# Altium PCB Layout Simetrica.PcbDoc
Units mm, origin at the board's own origin, x right, y up, seen from the top; angles counter-clockwise.
Board outline 84.71 x 36.58 mm, 2 copper layers (Top Layer, Bottom Layer); 22 components, 8 nets, 44 pads, 0 vias.
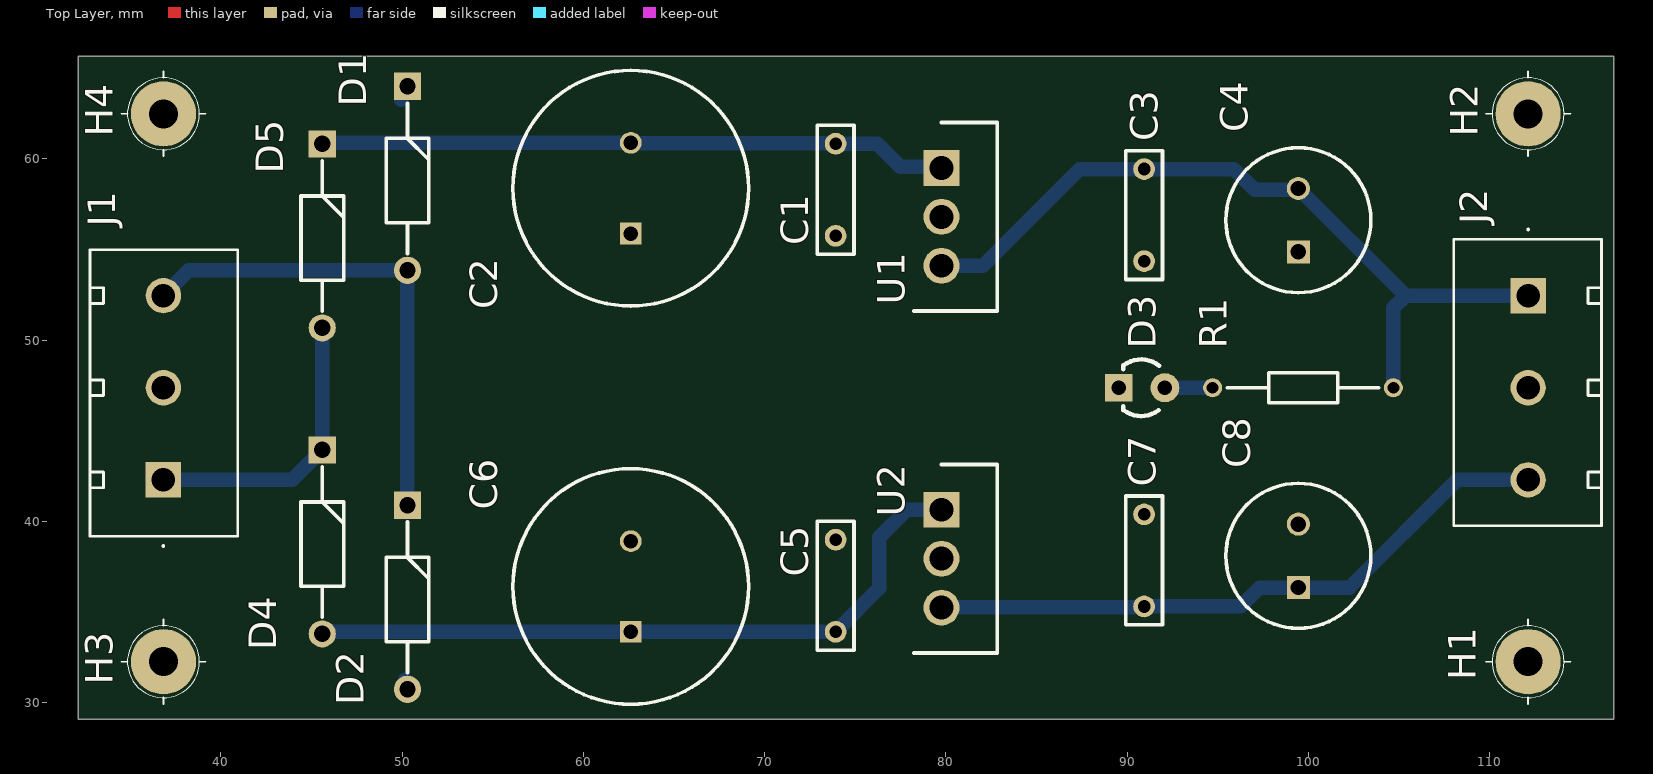
[diagram p0: Top Layer view]
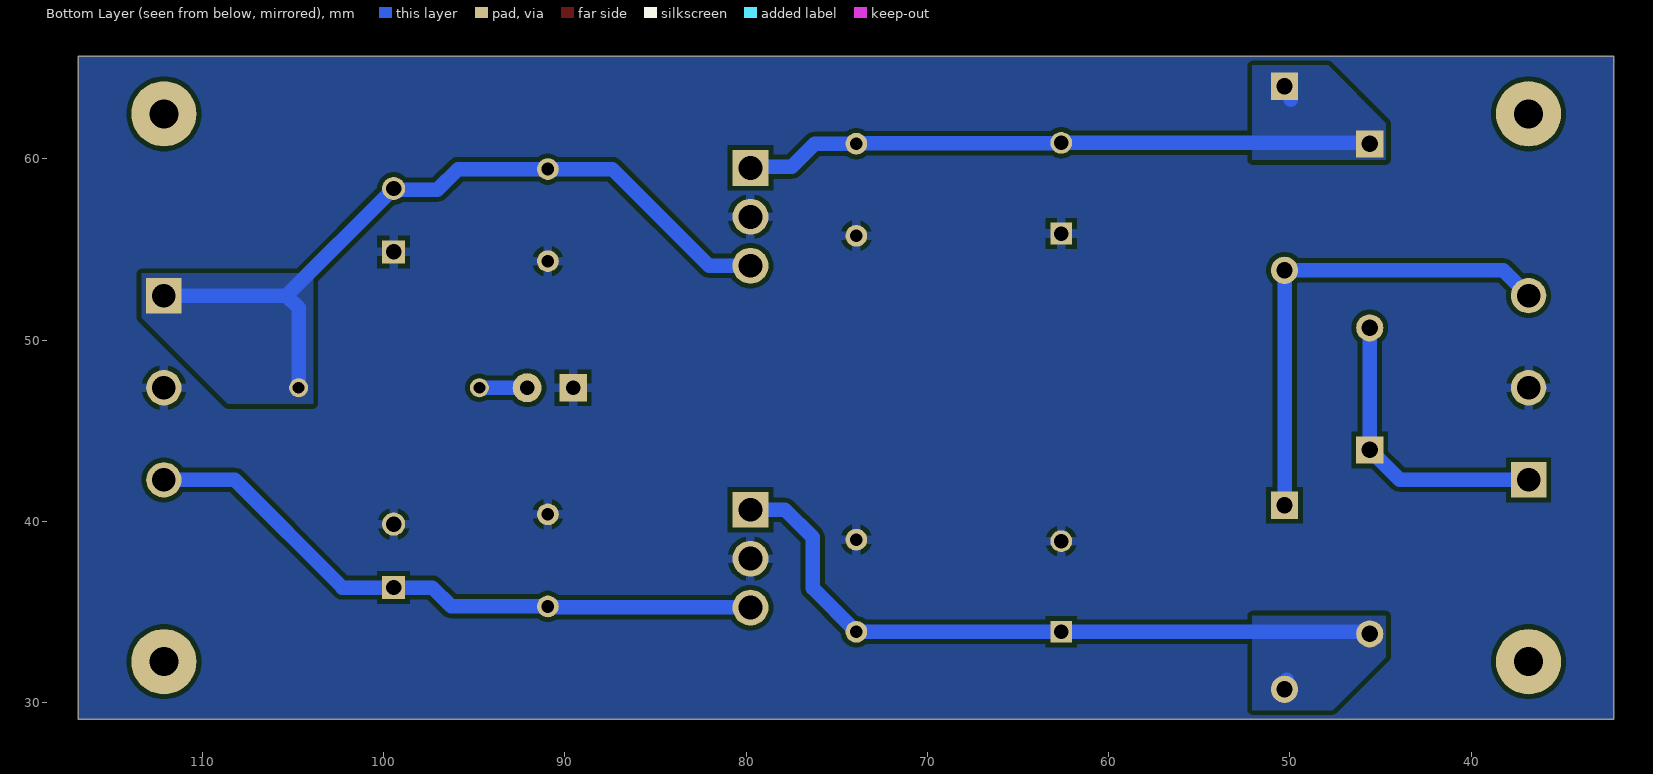
[diagram p1: Bottom Layer view, seen from below]
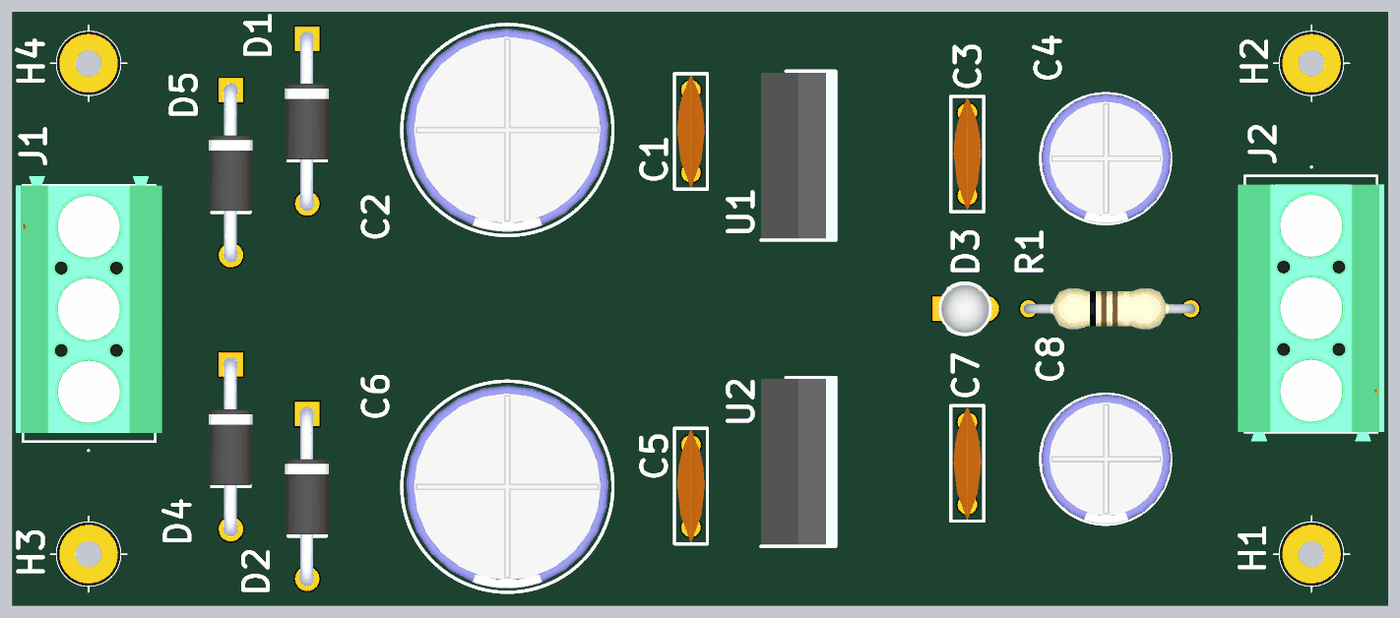
[diagram p2: 3D render of the assembled board from above, using the file's embedded part models]

## Layer stack, top to bottom
Top Solder: solder mask 0.0102, Solder Resist, Dk 3.5
Top Layer: signal copper 0.0356
Dielectric 1: dielectric 0.32, FR-4, Dk 4.8
Bottom Layer: signal copper 0.0356
Bottom Solder: solder mask 0.0102, Solder Resist, Dk 3.5

## Board outline
32.131,29.083 116.84,29.083 116.84,65.659 32.131,65.659

## Design rules (kind name [scope] priority, off if disabled: settings)
Clearance [All] p1: gap=0.254 ignorepadtopadclearanceinfootprint=FALSE except(0: Arc-Hole Track-Hole SMDPad-Hole THPad-Hole Via-Hole Fill-Hole Poly-Hole Region-Hole Text-Hole)
PolygonConnect PolygonConnect_1 [InNet('GND')] p1: thpad.connectstyle=Relief thpad.reliefconductorwidth=0.5 thpad.reliefentries=4 thpad.polygonreliefangle="90 Angle" thpad.airgapwidth=0.254 smdpad.connectstyle=Relief smdpad.reliefconductorwidth=0.254 smdpad.reliefentries=4 smdpad.polygonreliefangle="90 Angle" smdpad.airgapwidth=0.254 via.connectstyle=Relief via.reliefconductorwidth=0.254 via.reliefentries=4 via.polygonreliefangle="90 Angle" via.airgapwidth=0.254
PolygonConnect [All] p2: connectstyle=Direct reliefconductorwidth=0.254 reliefentries=4 polygonreliefangle="90 Angle" airgapwidth=0.254
RoutingVias [All] p1: holewidth=0.711 width=1.27 viastyle="Through Hole" minholewidth=0.711 minwidth=1.27 maxholewidth=0.711 maxwidth=1.27
SolderMaskExpansion [All] p1: expansion=0.102 istentingtop=FALSE
Width [All] p1: maxlimit=0.8 minlimit=0.254 preferedwidth=0.6 minimp=50.000000 maximp=50.000000 favimp=50.000000
30 further rules are at their usual default settings.

## Components (designator, comment, footprint, x,y, rotation, side; value= is the part's Value field where it differs from the comment)
C1 "100nF" RAD-0.2 73.914,58.293 r90 top value=1
C2 "1000x35" "CAP ELETROLITICO 1000" 62.611,58.38 r90 top
C3 "100nF" RAD-0.2 90.932,56.896 r90 top value=1
C4 "220x25" "CAP ELETROLITICO 220" 99.441,56.614 r90 top
C5 "100nF" RAD-0.2 73.914,36.449 r90 top value=1
C6 "1000x35" "CAP ELETROLITICO 1000" 62.611,36.409 r90 top
C7 "100nF" RAD-0.2 90.932,37.846 r90 top value=1
C8 "220x25" "CAP ELETROLITICO 220" 99.441,38.1 r90 top
D1 "Valor" DIOAD1405W58L465D235 50.292,58.801 r270 top
D2 "Valor" DIOAD1405W58L465D235 50.292,35.687 r270 top
D3 "LED" LED_3MM_RED 92.075,47.371 r180 top
D4 "Valor" DIOAD1405W58L465D235 45.593,38.742 r270 top
D5 "Valor" DIOAD1405W58L465D235 45.593,55.623 r270 top
H1 "M3" "Parafuso M3" 112.116,32.258 r0 top
H2 "M3" "Parafuso M3" 112.116,62.484 r0 top
H3 "M3" "Parafuso M3" 36.83,32.258 r0 top
H4 "M3" "Parafuso M3" 36.83,62.484 r0 top
J1 "Conector 2v Phoenix" "TERMINAL BLOCK 5MM 3V" 36.805,47.371 r270 top
J2 "Conector 2v Phoenix" "TERMINAL BLOCK 5MM 3V" 112.141,47.371 r90 top
R1 "2k2" "RES 1/4 PTH" 99.695,47.371 r0 top
U1 "L7812CV" TO220 79.756,56.802 r270 top
U2 "L7912CV" TO220 79.756,37.94 r270 top

## Footprints (in the part's own frame and the unit in brackets; to place one, negate y for a bottom-side part, rotate by r counter-clockwise, add the part's x,y. Pads: shape width x height; smd on the part's side, far side on the other; paste and mask are expansions set on the pad)
"CAP ELETROLITICO 220" [mm]
  round 1.275 hole 0.85: 1(1.75,0)
  rect 1.275x1.275 / inner round 1.275 / far side rect 1.275x1.275 hole 0.85: 2(-1.75,0)
  silkscreen extent -4,-4 4,4, body extent -4,-4.03 4.01,3.96, height 11.51
"CAP ELETROLITICO 1000" [mm]
  round 1.2 hole 0.8: 1(2.5,0)
  rect 1.2x1.2 / inner round 1.2 / far side rect 1.2x1.2 hole 0.8: 2(-2.5,0)
  silkscreen extent -6.5,-6.5 6.5,6.5, body extent -6.26,-6.25 6.25,6.25, height 20.01
DIOAD1405W58L465D235 [mm]
  round 1.5 hole 0.9: A(4.95,0)
  rect 1.5x1.5 hole 0.9: K(-5.2,0)
  silkscreen extent -4.28,-1.17 4.03,1.17, body extent -5.57,-1.38 5.37,1.32, height 2.69
LED_3MM_RED [mm] "Led 3 mm"
  round 1.6 hole 0.8: 1(0,0)
  rect 1.5x1.5 hole 0.8: 2(2.54,0)
  silkscreen extent 0.31,-1.56 2.29,1.56, body extent -0.38,-1.65 2.92,1.65, height 5.31
"Parafuso M3" [mm]
  round 3.6 hole 1.6 unplated: 18(0,0)
  silkscreen extent -2.33,-2.33 2.34,2.34
RAD-0.2 [mm]
  round 1.2 hole 0.7: 1(-2.54,0) 2(2.54,0)
  silkscreen extent -3.56,-1.02 3.56,1.02, body extent -3.5,-0.85 3.5,0.85, height 7.31
"RES 1/4 PTH" [mm]
  round 1.05 hole 0.65: 1(-4.988,0) 2(4.988,0)
  silkscreen extent -4.19,-0.82 4.19,0.82, body extent -5.31,-1.25 5.29,1.25, height 2.75
"TERMINAL BLOCK 5MM 3V" [mm]
  rect 1.95x1.95 hole 1.3: 1(5.08,0.025)
  round 1.95 hole 1.3: 2(0,0.025) 3(-5.08,0.025)
  silkscreen extent -7.62,-4.02 8.78,4.13, body extent -8.16,-4.45 7.65,4.55, height 3
TO220 [mm]
  rect 1.98x1.98 / inner round 1.98 / far side rect 1.98x1.98 hole 1.32: 1(-2.7,0)
  round 1.98 hole 1.32: 2(0,0) 3(2.7,0)
  silkscreen extent -5.2,-1.53 5.2,3.07, body extent -5.1,-1.53 5.1,3.07, height 19.21

## Part data
C1 C3 C5 C7: library part C, "Capacitor"
C2 C4 C6 C8: library part "CAP POL", "Polarized Capacitor (Radial)", LatestRevisionDate=17-Jul-2002, LatestRevisionNote="Re-released for DXP Platform.", PackageDescription="Polarized Capacitor (Radial); 2 Leads", PackageReference=RB7.6-15, Published=8-Jun-2000, Publisher="Altium Limited"
D1 D2 D4 D5: library part "DIODO 1N4007", "Retificador 1A 1000v", Code_JEDEC=DO-204-AL, ComponentLink1Description="Manufacturer Link", ComponentLink1URL=http://www.fairchildsemi.com/, ComponentLink2Description=Datasheet, ComponentLink2URL=http://www.fairchildsemi.com/ds/1N%2F1N4001.pdf, DatasheetVersion=1998, LatestRevisionDate=17-Jul-2002, LatestRevisionNote="Re-released for DXP Platform.", PackageDescription="Diode, Axial; Body 5.2 x 2.7 mm (LxDia. max), Lead Dia. 0.86 mm (max)", PackageReference=DO-41, PackageVersion=Aug-1999, Published=8-Jun-2000, Publisher="Altium Limited"
H1 H2 H3 H4: library part "Furo M3"
J1 J2: library part "Conector 3v Phoenix_1", "Block, Terminal; 6 A; 63 V; 2.54 mm; 26 to 20 AWG; 2; Screw; Soldering; 1.5 kV", Color=Green, Current=6A, Flammability Rating="UL94 V-0", Manufacturer="Phoenix Contact", Manufacturer Part Number=1725656, Max Supply Voltage=63V, Package Quantity=50, Supplier Part Number 1=651-1725656, Voltage=125V, Approvals=UL,CSA,cULus,EAC, Category="Terminal Blocks", ComponentLink1Description=https://datasheet.ciiva.com/16071/1725656-16071846.pdf?src-supplier=Onlinecomponents.com, ComponentLink1URL=https://datasheet.ciiva.com/16071/1725656-16071846.pdf?src-supplier=Onlinecomponents.com, ComponentLink2Description=https://datasheet.ciiva.com/15169/getdatasheetpartid-199323-15169849.pdf?src-supplier=Verical, ComponentLink2URL=https://datasheet.ciiva.com/15169/getdatasheetpartid-199323-15169849.pdf?src-supplier=Verical, ComponentLink3Description=https://datasheet.ciiva.com/823/1725656-823793.pdf?src-supplier=Digi-Key, ComponentLink3URL=https://datasheet.ciiva.com/823/1725656-823793.pdf?src-supplier=Digi-Key, ComponentLink4Description=https://datasheet.ciiva.com/1120/319957-1120510.pdf?src-supplier=Farnell, ComponentLink4URL=https://datasheet.ciiva.com/1120/319957-1120510.pdf?src-supplier=Farnell, ComponentLink5Description=https://datasheet.ciiva.com/26340/788052-da-01-en-100ntklemme-1725656-250-st-26340907.pdf?src-supplier=Conrad, ComponentLink5URL=https://datasheet.ciiva.com/26340/788052-da-01-en-100ntklemme-1725656-250-st-26340907.pdf?src-supplier=Conrad, Connector Type="Screw,PCB,Terminal Block", Contact Material=Tin, Current Rating=6A, Depth=6.2mm, Height=6.2mm, Housing Color=Green, Housing Material=Polyamide, Insulation Material=Nylon, Lead Free="Lead Free", Length=5.54mm, Max Current Rating=6A, Mount="Through Hole", Number of Circuits=2, Number of Contacts=2, Number of Levels=1, Number of Pins=2, Number of Poles=2, Number of Positions=2, Number of Positions Per Level=2, Number of Rows=1, Orientation=Straight, Packaging=Bulk, Pitch=2.54mm, Pricing 1="1=1,94000, 10=1,76000, 50=1,69000, 100=1,64000, 1000=1,27000, 10000=1,17000 (USD)", Radiation Hardening=No, Reach SVHC Compliant=Yes, RoHS=Yes, RoHS Compliant=Yes, Series=MPT, Stock 1=29866, Stripping Length=4.5mm, Termination=Solder, Voltage Rating=125V, Weight=0.022575oz, Width=12mm, Wire Gauge (Max)=26AWG, Wire Gauge (Min)=20AWG, Wire/Cable Gauge=26AWG
R1: library part "RESISTOR 1/4W", "Resistor", LatestRevisionDate=17-Jul-2002, LatestRevisionNote="Re-released for DXP Platform.", PackageDescription="Axial Device, Thru-Hole; 2 Leads; 0.4 in Pin Spacing", PackageReference=AXIAL-0.4, Published=8-Jun-2000, Publisher="Altium Limited"
U1: library part L78XXCV, "L7905CV, Voltage Regulator, Negative 1.5A -5 V, 3-Pin TO-220", Manufacturer_Name=STMicroelectronics, Manufacturer_Part_Number=L7905CV, Mouser Part Number=511-L7905CV, Datasheet Link=http://www.st.com/web/en/resource/technical/document/datasheet/CD00000450.pdf, Geometry.Height=4.6mm, Mouser Price/Stock=https://www.mouser.co.uk/ProductDetail/STMicroelectronics/L7905CV?qs=bZskSr8d5Y8JqSs%2FnmNLHA%3D%3D
U2: library part L79XXCV, "L7905CV, Voltage Regulator, Negative 1.5A -5 V, 3-Pin TO-220", Manufacturer_Name=STMicroelectronics, Manufacturer_Part_Number=L7905CV, Mouser Part Number=511-L7905CV, Datasheet Link=http://www.st.com/web/en/resource/technical/document/datasheet/CD00000450.pdf, Geometry.Height=4.6mm, Mouser Price/Stock=https://www.mouser.co.uk/ProductDetail/STMicroelectronics/L7905CV?qs=bZskSr8d5Y8JqSs%2FnmNLHA%3D%3D

## Nets (pads, with @x,y where several pads share a name; then routed paths per layer and width w, separated by ;. In a path a pad name is that pad's centre, name@x,y a point inside that pad or via, vN(x,y) a via of type N, cw(c..) or ccw(c..) an arc to the next point about the centre after c; other vN are vias at no path point)
GND: C1.1 C2.2 C3.1 C4.2 C5.2 C6.1 C7.2 C8.1 D3.2 J1.2 J2.2 U1.2 U2.2
NetC1_2: C1.2 C2.1 D1.K D5.K U1.1 | length 35.4
  Bottom Layer w0.8: D5.K@45.847,60.833 45.894,60.88 47.555,60.88 C2.1 62.635,60.857 73.89,60.857 C1.2 76.2,60.833 77.47,59.563 79.695,59.563 U1.1 ; D1.K@49.942,63.267 49.942,63.651 D1.K
NetC3_2: C3.2 C4.1 J2.1 R1.2 U1.3 | length 42.9
  Bottom Layer w0.8: U1.3 82.042,54.102 87.376,59.436 C3.2 95.885,59.436 97.028,58.293 99.37,58.293 C4.1 105.354,52.451 ; R1.2 104.683,51.779 105.354,52.451 ; J2.1 105.354,52.451
NetC5_1: C5.1 C6.2 D2.A D4.A U2.1 | length 39.2
  Bottom Layer w0.8: D4.A@45.593,33.785 45.717,33.909 53.464,33.909 C6.2 C5.1 76.327,36.322 76.327,39.116 77.851,40.64 U2.1 ; D2.A@50.158,31.252 50.158,30.871 D2.A
NetC7_1: C7.1 C8.2 J2.3 U2.3 | length 35.3
  Bottom Layer w0.8: U2.3 79.789,35.273 90.899,35.273 C7.1 96.266,35.306 97.31,36.35 C8.2 102.263,36.35 108.204,42.291 J2.3
NetD1_A: D1.A D2.K J1.3 | length 27
  Bottom Layer w0.8: J1.3 38.23,53.851 D1.A D2.K
NetD3_1: D3.1 R1.1 | length 2.6
  Bottom Layer w0.8: D3.1 R1.1
NetD4_K: D4.K D5.A J1.1 | length 16.2
  Bottom Layer w0.8: J1.1 43.942,42.291 D4.K D5.A
pads on no net: H1.18 H2.18 H3.18 H4.18

## Polygon pours and split planes (outlines as drawn)
GND on Bottom Layer "GND_L02_P015" (solid, pour order 15): 32.131,65.659 32.131,29.083 116.84,29.083 116.84,65.659
NetC1_2 on Bottom Layer "NETC1_2_L02_P014" (solid, pour order 14): 44.704,59.944 44.704,61.976 47.879,65.151 52.07,65.151 52.07,59.944
NetC5_1 on Bottom Layer "NETC5_1_L02_P013" (solid, pour order 13): 44.704,34.798 44.704,32.512 47.625,29.591 52.07,29.591 52.07,34.798
NetC3_2 on Bottom Layer "NETC3_2_L02_P000" (solid, pour order 0): 103.886,46.482 108.605,46.482 113.345,51.222 113.345,53.68 103.927,53.68 103.886,53.721

## Silkscreen, mask and mechanical layers (free items; w line width, h text height)
Borda:
  lines w0.1: 32.131,29.083 32.131,65.659 116.84,65.659 116.84,29.083 55.753,29.083 32.131,29.083